# Altium PCB logi-edu.PcbDoc (part 1 of 2)
Units mil, origin at the board's own origin, x right, y up, seen from the top; angles counter-clockwise.
Board outline 3607 x 2055 mil, 4 copper layers (Top Layer, Mid-Layer 1, Mid-Layer 2, Bottom Layer); 75 components, 66 nets, 321 pads, 127 vias.
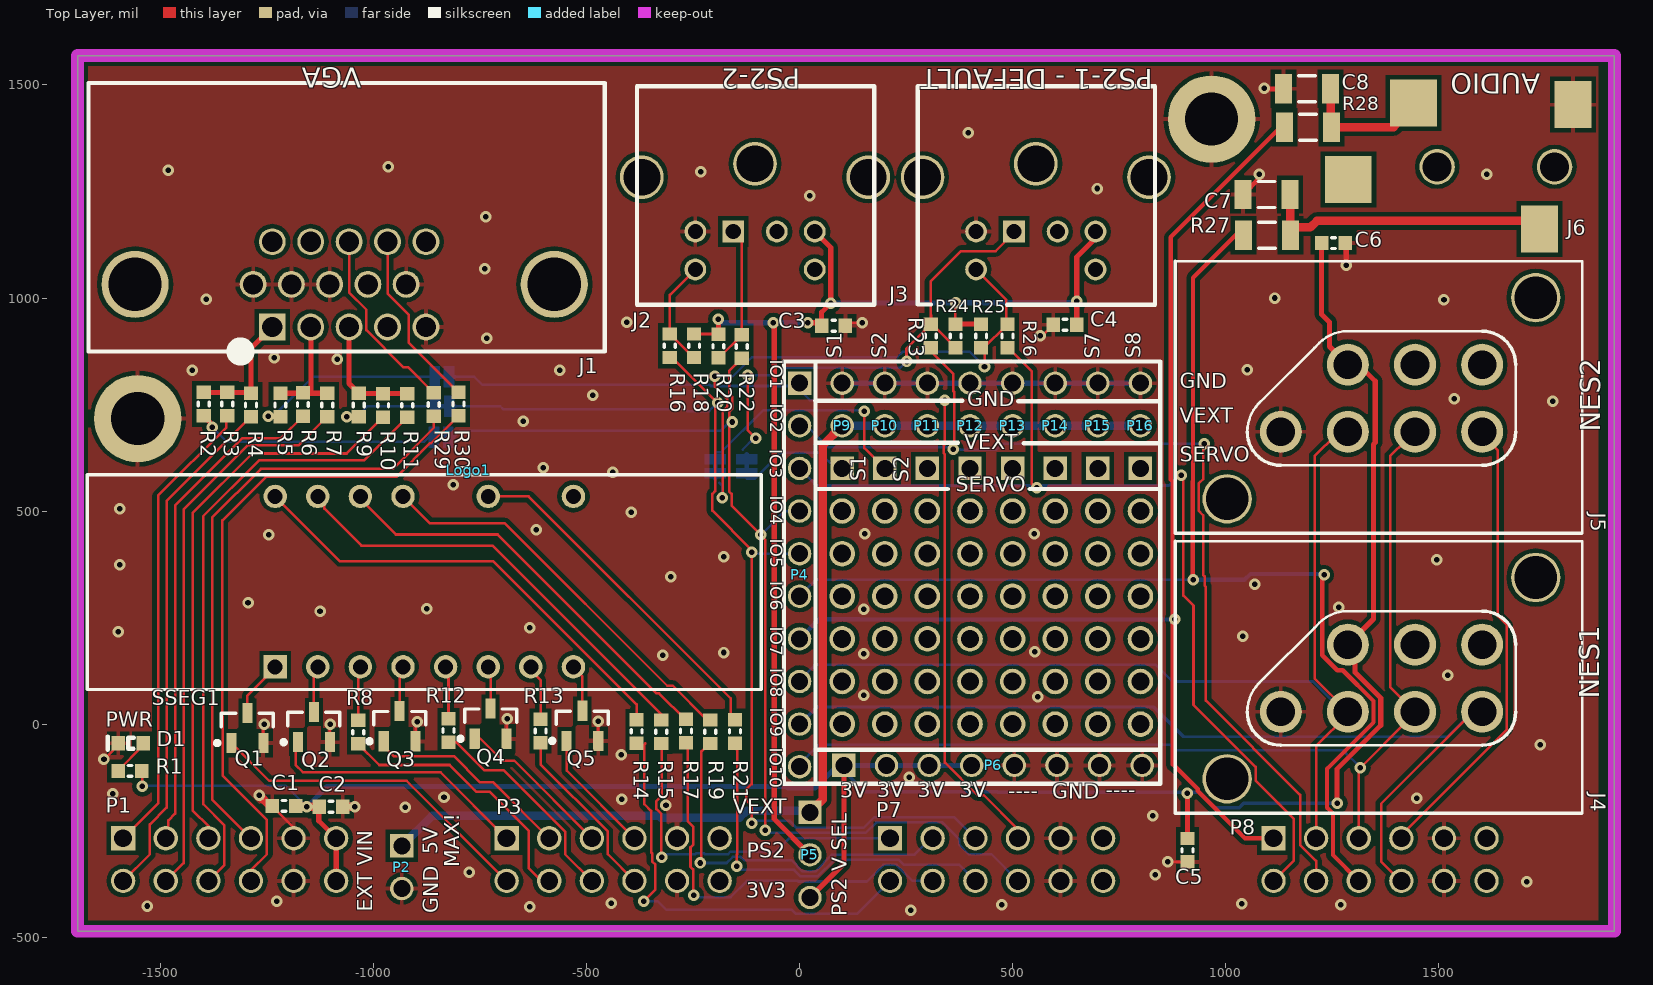
[diagram p0: Top Layer view]
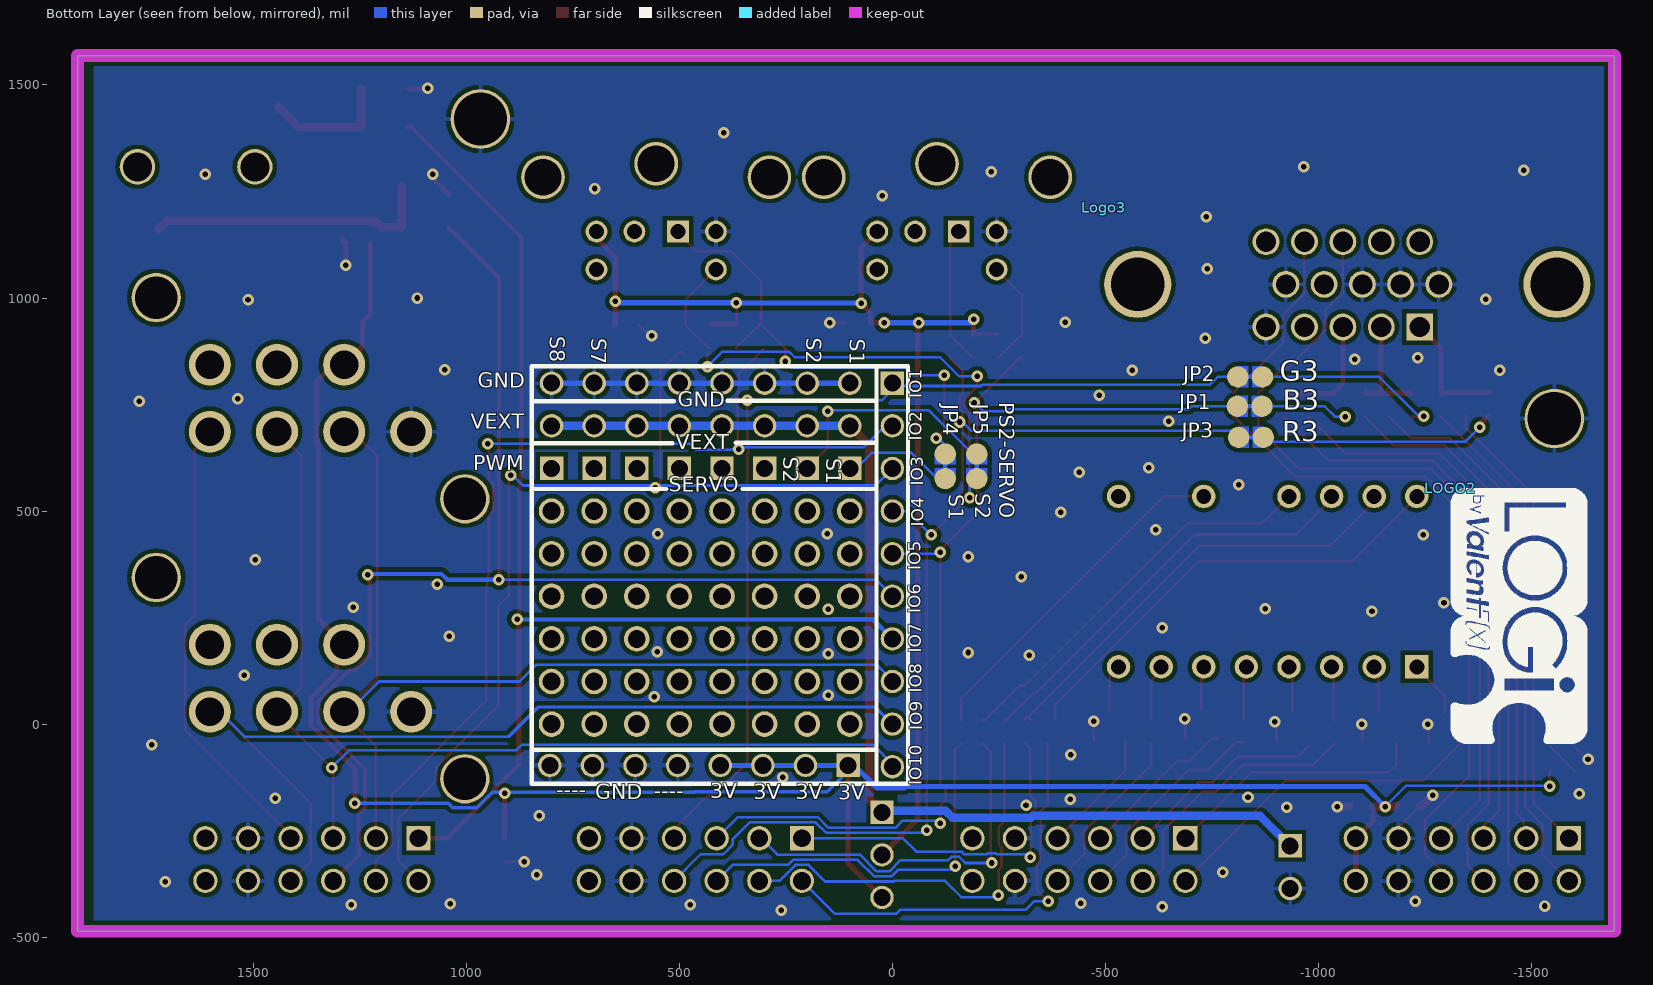
[diagram p1: Bottom Layer view, seen from below]
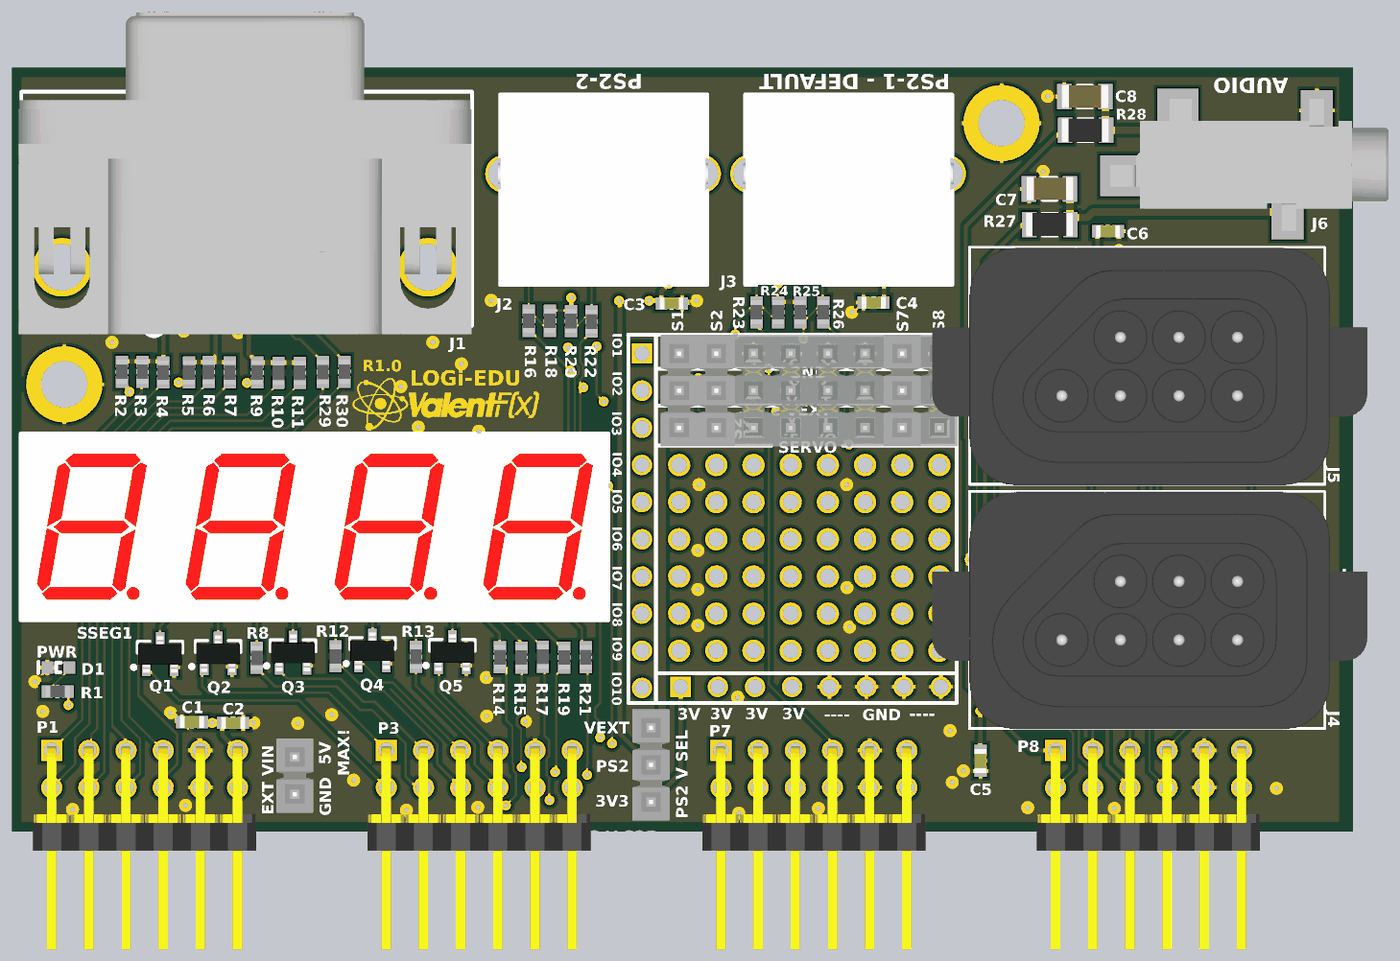
[diagram p3: 3D render of the assembled board from above, using the file's embedded part models]

## Layer stack, top to bottom
Top Solder: solder mask 0.4, Solder Resist, Dk 3.5
Top Layer: signal copper 1.4
Dielectric1: dielectric 12.6, FR-4, Dk 4.8
Mid-Layer 1: signal copper 1.4
Dielectric2: dielectric 12.6, FR-4, Dk 4.8
Mid-Layer 2: signal copper 1.4
Dielectric3: dielectric 12.6, FR-4, Dk 4.8
Bottom Layer: signal copper 1.4
Bottom Solder: solder mask 0.4, Solder Resist, Dk 3.5

## Board outline
-1694.56,-486 1912.44,-486 1912.44,1569 -1694.56,1569

## Design rules (kind name [scope] priority, off if disabled: settings)
Clearance Poly [InPoly] p1: gap=10
Clearance [All] p2: gap=6
ComponentClearance clearance_logo [(ObjectKind = 'Component') And  (Name = 'Logo1')  or (ObjectKind = 'Component') And  (Name = 'Logo2')   or (ObjectKind = 'Component') And  (Name = 'Logo3')   or (ObjectKind = 'Component') And  (Name = 'Logo4')   or (ObjectKind = 'Component') And  (Name = 'Logo5')] p1: gap=0 collisioncheckmode=3 verticalgap=10 showdistances=FALSE
ComponentClearance ComponentClearance_1 [OnLayer('Mechanical 1')] p2: gap=0 collisioncheckmode=3 verticalgap=0 showdistances=FALSE
ComponentClearance [All] p3: gap=1 collisioncheckmode=3 verticalgap=10 showdistances=FALSE
Height [All] p1: minheight=0 maxheight=1500 prefheight=500
HoleSize [All] p1: absolutevalues=TRUE maxlimit=250 minlimit=1 maxpercent=80.000 minpercent=20.000
HoleToHoleClearance [All] p1: gap=2 allowstackedmicrovias=TRUE
MinimumSolderMaskSliver [All] p1: minsoldermaskwidth=0
PlaneClearance [All] p1: clearance=10
PolygonConnect via [isvia] p1: connectstyle=Direct reliefconductorwidth=10 reliefentries=4 polygonreliefangle="90 Angle" airgapwidth=10
PolygonConnect PolygonConnect_1 [All] p2: connectstyle=Relief reliefconductorwidth=10 reliefentries=4 polygonreliefangle="90 Angle" airgapwidth=10
RoutingVias [All] p1: holewidth=13 width=27 viastyle="Through Hole" minholewidth=13 minwidth=27 maxholewidth=13 maxwidth=27
SilkToSilkClearance [All] p1: silktosilkclearance=0
SilkToSolderMaskClearance SilkscreenOverComponentPads [IsPad] p1: minsilkscreentomaskgap=0 clearancetoexposedcopper=TRUE
SolderMaskExpansion SolderMaskExpansion_1 [ISVIA] p1: expansion=-100
SolderMaskExpansion [All] p2: expansion=4
Width [All] p1: maxlimit=20 minlimit=6 preferedwidth=12
21 further rules are at their usual default settings.

## Classes and differential pairs
component class logi-edu-top: Logo1 LOGO2 Logo2 Logo3 Screw1 Screw2 STDOFF1 STDOFF2
component class ANALOG_IO: C53

## Components (designator, comment, footprint, x,y, rotation, side; value= is the part's Value field where it differs from the comment)
C1 "4.7uF" C0603 -1210,-192 r180 top
C2 ".1uF" C0603 -1100,-194 r0 top
C3 ".1uF" C0603 80,935 r180 top
C4 ".1uF" C0603 623,937 r0 top
C5 ".1uF" C0603 910.44,-296 r270 top
C6 ".1uF" C0603 1253,1129 r0 top
C7 "4700pF" C1206 1096,1243 r180 top
C8 "4700pF" C1206 1191,1491 r180 top
D1 "598-8010-107F" "LED_0603 - RED" -1569.56,-45 r180 top
J1 "VGA" 1-1734530-1 -1237.56,932 r180 top locked
J2 "PS/2" "MD-60S - PS/2" -104.56,1067 r180 top locked
J3 "PS/2" "MD-60S - PS/2" 554.44,1067 r180 top locked
J4 "450-32360" "NES - 450-32360" 1129.44,29 r90 top locked
J5 "450-32360" "NES - 450-32360" 1129.44,686 r90 top locked
J6 "SJ-3524-SMT-TR" SJ-3524-SMT 1772,1308 r180 top
JP1 "Solder Jumper-NC" SOLDER_JUMPER-NC -809.56,746 r0 bottom net-tie
JP2 "Solder Jumper-NC" SOLDER_JUMPER-NC -810.56,815 r0 bottom net-tie
JP3 "Solder Jumper-NC" SOLDER_JUMPER-NC -812.56,673 r0 bottom net-tie
JP4 "Solder Jumper-NC" SOLDER_JUMPER-NC -124,634 r90 bottom net-tie
JP5 "Solder Jumper-NC" SOLDER_JUMPER-NC -198,576 r270 bottom net-tie
Logo1 "Valent Logo 500" VALENTFX_500-SolderMask -777.56,596 r0 top
LOGO2 "LOGI-600" LOGI-600-SILK -1309.56,554 r270 bottom
Logo3 "Valent Logo 1000" ValentFX_1000-SolderMask -495.56,1212 r180 bottom
P1 "MTSW-106-07-G-D-130-RA" "PMOD HEADER - Male"#1 -1587.56,-268 r180 top locked
P2 "Header2 - Male" "HDR - PRPC002SAAN-RC" -933.56,-286 r270 top
P3 "MTSW-106-07-G-D-130-RA" "PMOD HEADER - Male"#2 -437.56,-318 r180 top
P4 "Header10" "HEADER_10_40_100THRU SIP" 0,800 r270 top
P5 "Header3 Male" "HDR - PRPC003SAAN-RC" 24.44,-207 r270 top
P6 "Header8" "HEADER_8_40_100THRU SIP" 104,-97 r0 top locked
P7 "MTSW-106-07-G-D-130-RA" "PMOD HEADER - Male"#2 462.44,-318 r180 top
P8 "MTSW-106-07-G-D-130-RA" "PMOD HEADER - Male"#2 1362.44,-318 r180 top
P9 "Header3 Male" "HDR - PRPC003SAAN-RC" 100,600 r90 top
P10 "Header3 Male" "HDR - PRPC003SAAN-RC" 200,600 r90 top
P11 "Header3 Male" "HDR - PRPC003SAAN-RC" 300,600 r90 top
P12 "Header3 Male" "HDR - PRPC003SAAN-RC" 400,600 r90 top
P13 "Header3 Male" "HDR - PRPC003SAAN-RC" 500,600 r90 top
P14 "Header3 Male" "HDR - PRPC003SAAN-RC" 600,600 r90 top
P15 "Header3 Male" "HDR - PRPC003SAAN-RC" 700,600 r90 top
P16 "Header3 Male" "HDR - PRPC003SAAN-RC" 800,600 r90 top
Q1 "DMN65D8L-7" SOT-23 -1296,-9 r90 top
Q2 "DMN65D8L-7" SOT-23 -1140,-7 r90 top
Q3 "DMN65D8L-7" SOT-23 -938.56,-5 r90 top
Q4 "DMN65D8L-7" SOT-23 -725,1 r90 top
Q5 "DMN65D8L-7" SOT-23 -510,-4 r90 top
R1 "330" R0603 -1571.56,-110 r0 top
R2 "1.5k" R0603 -1398.56,751 r90 top
R3 "330" R0603 -1343.56,751 r90 top
R4 "680" R0603 -1287.56,749 r90 top
R5 "1.5k" R0603 -1218.56,749 r90 top
R6 "330" R0603 -1165.56,750 r90 top
R7 "680" R0603 -1108.56,749 r90 top
R8 "100" R0603 -1036,-19 r270 top
R9 "1.5k" R0603 -1034.56,749 r90 top
R10 "330" R0603 -977.56,748 r90 top
R11 "680" R0603 -920.56,748 r90 top
R12 "100" R0603 -824,-15 r270 top
R13 "100" R0603 -608,-16 r270 top
R14 "100" R0603 -382.56,-17 r270 top
R15 "100" R0603 -324.56,-18 r270 top
R16 "220" R0603 -304.56,888 r90 top
R17 "100" R0603 -266.56,-16 r270 top
R18 "10k" R0603 -247.56,888 r90 top
R19 "100" R0603 -209.56,-18 r270 top
R20 "10k" R0603 -190.56,887 r90 top
R21 "100" R0603 -151.56,-17 r270 top
R22 "220" R0603 -135.56,886 r90 top
R23 "220" R0603 308,911 r90 top
R24 "10k" R0603 366,911 r90 top
R25 "10k" R0603 426,911 r90 top
R26 "220" R0603 488,911 r90 top
R27 "3.3k" R1206 1097,1147 r0 top
R28 "3.3k" R1206 1193,1401 r0 top
R29 "100" R0603 -858.56,750 r270 top
R30 "100" R0603 -800.56,751 r270 top
SSEG1 "7SEG" "LED - SSEG - LTC-4727JR" -1230.75,134.33 r0 top locked

## Footprints (in the part's own frame and the unit in brackets; to place one, negate y for a bottom-side part, rotate by r counter-clockwise, add the part's x,y. Pads: shape width x height; smd on the part's side, far side on the other; paste and mask are expansions set on the pad)
1-1734530-1 [mm] "VGA DB15 HD connector female"
  rect 1.6x1.6 hole 1.2: 1(0,0)
  round 1.6 hole 1.2: 2(-2.29,0) 3(-4.58,0) 4(-6.87,0) 5(-9.16,0) 6(1.14,-2.54) 7(-1.14,-2.54) 8(-3.42,-2.54) 9(-5.7,-2.54) 10(-7.98,-2.54) 11(0,-5.08) 12(-2.29,-5.08) 13(-4.58,-5.08) 14(-6.87,-5.08) 15(-9.16,-5.08)
  round 4 hole 3.18: X(-16.81,-2.54) X(8.18,-2.54)
  silkscreen extent -19.82,-14.54 10.96,1.54, body extent -19.79,-20.01 11.16,2.04, height 12.25
C0603 [mm] "0603 Generic"
  rect 0.8x0.85 smd: 1(-0.7,0) 2(0.7,0)
  silkscreen extent -0.1,-0.33 0.1,0.33, body extent -0.8,-0.42 0.82,0.4, height 0.46
C1206 [mm] "1206 Generic"
  rect 1x1.75 smd: 1(-1.4,0) 2(1.4,0)
  silkscreen extent -0.5,-0.77 0.5,0.77, body extent -1.63,-0.82 1.57,0.78, height 1.25
"HDR - PRPC002SAAN-RC" [mil]
  rect 55x55 hole 40: 1(0,0)
  round 55 hole 40: 2(100,0)
  body extent -50,-50 150,50, height 205
"HDR - PRPC003SAAN-RC" [mil]
  rect 55x55 hole 40: 1(0,0)
  round 55 hole 40: 2(100,0) 3(200,0)
  body extent -50,-50 250,50, height 205
"HEADER_8_40_100THRU SIP" [mil]
  rect 55x55 hole 40: 1(0,0)
  round 55 hole 40: 2(100,0) 3(200,0) 4(300,0) 5(400,0) 6(500,0) 7(600,0) 8(700,0)
"HEADER_10_40_100THRU SIP" [mil] "HEADER 100 MIL PITCH"
  rect 55x55 hole 40: 1(0,0)
  round 55 hole 40: 2(100,0) 3(200,0) 4(300,0) 5(400,0) 6(500,0) 7(600,0) 8(700,0) 9(800,0) 10(900,0)
"LED - SSEG - LTC-4727JR" [mil] "LED - SSEG - LTC-4727JR"
  rect 55x55 hole 35: 1(0,0)
  round 55 hole 35: 2(100,0) 3(200,0) 4(300,0) 5(400,0) 6(500,0) 7(600,0) 8(700,0) 9(700,400) 11(500,400) 13(300,400) 14(200,400) 15(100,400) 16(0,400)
  silkscreen extent -441,-53 1141,451, body extent -441,-53 1141,451, height 276
"LED_0603 - RED" [mm] "LED_0603"
  rect 0.8x0.85 smd: A(-0.75,0) C(0.75,0)
  silkscreen extent -0.18,-0.41 1.37,0.38, body extent -0.8,-0.4 0.8,0.4, height 0.75
LOGI-600-SILK [mil]
  silkscreen extent 0,2 600,321
"MD-60S - PS/2" [mm]
  rect 1.3x1.3 hole 0.9: 1(1.3,-2.26)
  round 1.3 hole 0.9: 2(-1.3,-2.26) 3(3.56,-2.26) 4(-3.56,-2.26) 5(3.56,0) 6(-3.56,0)
  round 2.6 hole 2.2: x(-6.75,-5.5) x(0,-6.3) x(6.75,-5.5)
  silkscreen extent -7.11,-10.92 7.04,2.1, body extent -7.17,-11 7.17,2.1, height 13.3
"NES - 450-32360" [mm] "NES Controller Socket"
  round 2.5 hole 1.7: 1(0,0) 2(0,-4) 3(0,-8) 4(0,-12) 5(4,-12) 6(4,-8) 7(4,-4)
  round 2.94 hole 2.54 paste+0: 8(-4,3.2) 9(8,-15.2)
  silkscreen extent -6.04,-17.96 10.16,6.3, body extent -6.12,-20.85 10.13,8.86, height 17.61
"PMOD HEADER - Male"#1 [mil] "68021-212HLF"
  rect 57x57 hole 42: 1(0,0)
  round 57 hole 42: 2(-100,0) 3(-200,0) 4(-300,0) 5(-400,0) 6(-500,0) 7(0,100) 8(-100,100) 9(-200,100) 10(-300,100) 11(-400,100) 12(-500,100)
  body extent -550,-10 50,536, height 225
"PMOD HEADER - Male"#2 [mil] "68021-212HLF"
  rect 57x57 hole 42: 1(250,-50)
  round 57 hole 42: 2(150,-50) 3(50,-50) 4(-50,-50) 5(-150,-50) 6(-250,-50) 7(250,50) 8(150,50) 9(50,50) 10(-50,50) 11(-150,50) 12(-250,50)
  body extent -300,-60 300,486, height 225
R0603 [mm] "0603 Generic"
  rect 0.8x0.85 smd: 1(-0.7,0) 2(0.7,0)
  silkscreen extent -0.1,-0.33 0.1,0.33, body extent -0.81,-0.41 0.81,0.41, height 0.46
R1206 [mm] "1206 Generic"
  rect 1x1.75 smd: 1(-1.4,0) 2(1.4,0)
  silkscreen extent -0.5,-0.77 0.5,0.77, body extent -1.63,-0.8 1.57,0.8, height 0.55
SJ-3524-SMT [mm] "3.5MM Stereo Audio Jack"
  rect 2.2x2.8 smd: 1(-1.1,-3.7) 3(0.9,3.7)
  rect 2.8x2.8 smd: 2(8.4,-3.81) 4(12.3,0.75)
  round 2.108 hole 1.727 unplated: H1(7,0) H2(0,0)
  body extent -5.99,-4.5 13.01,4.5, height 5
SOLDER_JUMPER-NC [mil]
  round 50 smd: 1(0,0) 2(-58,0)
  Top Layer region: 0.09,-24.99 -24.91,-24.99 -24.91,25.01 0.09,25.01
  Top Layer region: -32.91,-24.99 -57.91,-24.99 -57.91,25.01 -32.91,25.01
  Top Layer lines w10: -50,0 0,0
SOT-23 [mm] "SOT-23"
  rect 1.2x0.6 smd: 1(-0.9,0.95) 2(-0.9,-0.95) 3(0.9,0)
  silkscreen extent -1.02,-1.55 0.87,1.92, body extent -1.27,-1.5 1.23,1.5, height 1.07
VALENTFX_500-SolderMask [mil]
ValentFX_1000-SolderMask [mil]

## Part data
C1: library part "C0603 - GRM188F51A475ZE20D", "4.7uF 10volts Y5V +80-20% (MLCC) - SMD/SMT 0603"
C2 C3 C4 C5 C6: library part "C0603 - GRM188R71H104KA93D", "0.1uF 50volts X7R 10% MLCC SMD/SMT 0603"
C7 C8: library part "C1206 - C1206C472K5RACTU", "CAP CER 4700PF 50V 10% X7R 1206"
D1: library part "LED0603 - 598-8010-107F", "LED ALINGAP RED CLEAR 0603 SMD"
J1: library part "VGA - 1-1734530-1", "CONN HD D-SUB RCPT R/A 15POS"
J2 J3: library part "Con - D-60S", "CONN MINIDIN RECPT UNSHIELD 6POS - PS/2 mouse - keybaord"
J4 J5: "NES CONTROLLER SOCKET"
J6: "CONN AUDIO JACK 3.5MM STEREO SMD"
JP1 JP2 JP3 JP4 JP5: "Solder/Configuration Jumper"
P1 P3 P7 P8: library part "P-MOD - MTSW-106-07-G-D-130-RA", "Samtec Male Conn Unshrouded Header HDR 12 POS 2.54mm Solder RA Thru-Hole"
P2: library part "HDR - PRPC002SAAN-RC", "2POS male CONN HEADER .100\" SNGL STR"
P4: "Header 10 pin"
P5 P9 P10 P11 P12 P13 P14 P15 P16: library part "HDR - PRPC003SAAN-RC", "3POS Male CONN HEADER .100\" SNGL STR"
P6: "Header 8 pin"
Q1 Q2 Q3 Q4 Q5: library part "NMOS - DMN65D8L-7", "MOSFET N-CH 60V 310MA SOT23"
R1 R3 R6 R10: library part "R0603 - ERJ-3EKF3300V", "RES 330 OHM 1/10W 1% 0603 SMD"
R2 R5 R9: library part "R0603 - ERJ-3EKF1501V", "RES 1.5K OHM 1/10W 1% 0603 SMD"
R4 R7 R11: library part "R0603 - ERJ-3EKF6800V", "RES 680 OHM 1/10W 1% 0603 SMD"
R8 R12 R13 R14 R15 R17 R19 R21 R29 R30: library part "R0603 - CRCW0603100RFKEA", "100 ohms 1% Thick Film Resistors - SMD 1/10watt"
R16 R22 R23 R26: library part "R0603 - ERJ-3EKF2200V", "220 - thick Film Resistors - SMD 0603 220ohms 1% Tol"
R18 R20 R24 R25: library part "R0603 - CRCW060310K0FKEA", "10k Thick Film Resistors - SMD 1/10watt 10Kohms 1%"
R27 R28: library part "R1206 - ERJ-8ENF3301V", "RES 3.3K OHM 1/4W 1% 1206 SMD"
SSEG1: library part "LED - SSEG - LTC-4727JR", "LED Displays & Accessories 4 Digit, Red Low Current"

## Free pads (board coordinates)
  round 205 / inner round 140 / far side round 140 hole 125: MT1(967,1420) MT2(-1553.56,717)
  round 60 hole 42: X(100,0) X(100,100) X(100,200) X(100,300) X(100,400) X(100,500) X(200,0) X(200,100) X(200,200) X(200,300) X(200,400) X(200,500) X(300,0) X(300,100) X(300,200) X(300,300) X(300,400) X(300,500) X(400,0) X(400,100) X(400,200) X(400,300) X(400,400) X(400,500) X(500,0) X(500,100) X(500,200) X(500,300) X(500,400) X(500,500) X(600,0) X(600,100) X(600,200) X(600,300) X(600,400) X(600,500) X(700,0) X(700,100) X(700,200) X(700,300) X(700,400) X(700,500) X(800,0) X(800,100) X(800,200) X(800,300) X(800,400) X(800,500)

## Via types
v1: diameter 27, hole 13, Top Layer to Bottom Layer, 127 vias

## Nets (pads, with @x,y where several pads share a name; then routed paths per layer and width w, separated by ;. In a path a pad name is that pad's centre, name@x,y a point inside that pad or via, vN(x,y) a via of type N, cw(c..) or ccw(c..) an arc to the next point about the centre after c; other vN are vias at no path point)
3V3: C1.1 C2.1 C5.1 C6.1 J4.7 J5.7 P1.6 P1.12 P5.3 P6.1 P6.2 P6.3 P6.4 R1.2 | length 5392.8
  Top Layer w6: R1.2@-1544,-110 -1542.56,-111.44 v1(-1542.56,-146)
  Top Layer w12: C2.1@-1128.56,-209.56 -1128.56,-227 P1.6@-1087.56,-268 ; P1.6@-1091,-273 -1087.56,-276.44 P1.12@-1087.56,-368 ; P5.3@24.44,-407 104,-327.44 P6.1@104,-97 ; v1(909.44,-162) 911.44,-162 910.44,-163 C5.1@910.44,-268.44 ; C6.1@1225.44,1129 1225,1128.56 1225,962 1244,943 1244,886.4 J5.7@1286.92,843.48 ; v1@1261,-186 1261,-106.12 1364.13,-2.98 1364.13,60.98 1304,121.12 J4.7@1304,174 ; J4.7@1286.92,186.48 1347,246.56 1347,656.51 1351.13,660.65 1351.13,804.87 J5.7@1304,852
  Top Layer w20: C1.1@-1182.44,-192 -1180.44,-194 v1(-1156.5,-194) C2.1@-1127.56,-194
  Bottom Layer w6: v1(-1542.56,-146) -1541.06,-144.5 -1206,-144.5 v1(-1156.5,-194)
  Bottom Layer w8: P6.1@92,-98 153,-159 464.21,-159 465.21,-160 938.99,-160 975.34,-196.35 1031.57,-196.35 1041.93,-186 v1(1262.44,-186)
  Bottom Layer w12: v1(-1156.5,-194) -1109,-146.5 -31,-146.5 -27.5,-150 36.44,-150 89.44,-97 P6.1@104,-97 P6.2@204,-97 P6.3@304,-97 P6.4@404,-97
EXT_VIN: P2.1 P5.1 P9.2 P10.2 P11.2 P12.2 P13.2 P14.2 P15.2 P16.2 | length 2635.2
  Top Layer w20: P5.1@24.44,-207 54,-177.44 54,654 P9.2@100,700
  Bottom Layer w20: P2.1@-933.56,-286 -863.06,-215.5 -329.78,-215.5 -325.78,-219.5 -140.78,-219.5 -124.78,-203.5 20.94,-203.5 P5.1@24.44,-207 ; P9.2@100,700 P10.2@200,700 P11.2@300,700 P12.2@400,700 P13.2@500,700 P14.2@600,700 P15.2@700,700 P16.2@800,700
GND: C1.2 C2.2 C3.1 C4.1 C5.2 C6.2 C7.2 C8.2 D1.C J1.5 J1.6 J1.7 J1.8 J1.10 J2.3 J3.3 J4.1 J5.1 J6.1 P1.5 P1.11 P2.2 P3.5 P3.11 P6.5 P6.6 P6.7 P6.8 P7.5 P7.11 P8.5 P8.11 P9.3 P10.3 P11.3 P12.3 P13.3 P14.3 P15.3 P16.3 pad.MT1 pad.MT2 Q1.2 Q2.2 Q3.2 Q4.2 Q5.2 | length 1440.9
  Top Layer w6: v1(-1632.56,-83) -1632.09,-83 D1.C@-1602.09,-53 ; Q1.2@-1258.6,-44.43 -1258.6,-2.6 v1(-1256,0) ; C1.2@-1238,-192 -1187.56,-242.44 P1.5@-1187.56,-268 ; Q2.2@-1102.6,-42.43 -1102.6,-0.6 v1(-1102,0) ; v1(-1044,-194) v1@-1041,-191 ; Q3.2@-901.16,-40.43 -901.16,1.84 v1(-897,6) ; Q4.2@-687.6,-34.43 -687.6,11.4 v1(-686,13) ; v1(-473,7) -472.6,6.6 Q5.2@-472.6,-39.43 ; C3.1@108.56,942 v1(147,942) ; v1(564.44,911) 569.44,911 C4.1@595.44,937 ; v1(864.44,-323) 865,-323.56 C5.2@910.44,-323.56
  Top Layer w12: C7.2@1040.88,1243 1079,1281.12 v1(1079,1290) ; v1(1091,1492) 1092,1491 C8.2@1135.88,1491 ; C6.2@1280.56,1129 1283,1126.56 v1(1283,1077) ; C6.2@1289.56,1129 C6.2@1289.56,1138
  Top Layer w20: v1(-1268,-167) -1243,-192 -1238,-192 C1.2@-1237.56,-192 ; C2.2@-1072.44,-194 v1(-1044,-194)
  Bottom Layer w12: P9.3@100,800 P10.3@200,800 P11.3@300,800 P12.3@400,800 P13.3@500,800 P14.3@600,800 P15.3@700,800 P16.3@800,800
  other v1: 260.44,-437 -633.56,-429 -1531.56,-427 474.44,-424 1270.44,-424 1037.44,-422 -441.56,-421 -1227.56,-416 1706.44,-370 834.44,-354 -775.56,-348 828.44,-215 -925.56,-195 -313.56,-190 -417.56,-176 1449,-174 -834.56,-172 -1611.56,-163 257.44,-125 -418.56,-72 1738.44,-49 558.44,64 150.44,68 1521.44,115 -321.56,162 150.44,165 -177.56,168 551.44,170 1040.44,206 -1598.56,217 -633.56,226 -1125.56,265 150.44,270 -875.56,271 1265,274 -1294.56,285 1068.44,327.9 -302.56,346 -1595.56,374 1495.44,386 -177.56,393 -1245.56,444 153.44,447 550.44,447 -617.56,456 -394.56,497 -1595.56,505 -812.56,562 -439,591 -601.56,602 -648.56,711 1767.44,758 1536.44,764 -485.56,772 -1425.56,830 -562.56,830 1050.7,831.87 -1085.56,856 -1232.56,860 -734.56,906 -405.56,943 1512.44,996 -1392.56,997 1115.44,1000 -738.56,1069 -736.56,1190.65 23.44,1240 698.44,1257 1612.44,1291 -231.56,1296 -1481.36,1300 -965.56,1308 395.44,1388
NES1_DAT/IO9: J4.4 P4.9 P8.10 | length 2147.8
  Top Layer w6: P8.10@1406,-364 1365,-323 1365,-187 1571,19 J4.4@1588,19
  Bottom Layer w6: 901,-29.21 1520.79,-29.21 J4.4@1577,27
  Bottom Layer w8: P4.9@0,0 40,40 831.79,40 901,-29.21
NES2_DAT: J5.4 P8.4 | length 1062.9
  Top Layer w6: P8.4@1412.44,-268 1412.44,-260.56 1660.09,-12.91 1660.09,232.69 1639.1,253.68 1639.1,637.9 1638.1,636.9 1638.1,642.9 J5.4@1611,670
NES_CLK/IO8: J4.2 J5.2 P4.8 P8.2 | length 2377.1
  Top Layer w6: P8.2@1212.44,-268 1212.44,-51.56 J4.2@1288,24 ; J5.2@1263,680 1260,680 1208.94,628.94 1208.94,106.98 J4.2@1286.92,29
  Bottom Layer w6: P4.8@-6,97 36,139 836,139 875,100 1205,100 J4.2@1277,28
NES_LAT/IO10: J4.3 J5.3 P4.10 P8.3 | length 2385.7
  Top Layer w6: P8.3@1312.44,-268 v1@1312.44,-106.56 ; v1@1316.5,-102.5 J4.3@1427,8 ; J5.3@1423,666 1386.19,629.19 1386.19,87.21 J4.3@1444.4,29 ; J4.3@1428,7 J4.3@1447.2,26.2
  Bottom Layer w6: P4.10@-5,-99 46,-48 869.39,-48 883,-61.61 1275.61,-61.61 v1(1316,-102)
NetC7_1: C7.1 J6.3 R27.2 | length 680.9
  Top Layer w20: C7.1@1151.12,1262 1151.12,1167 1152.12,1166 1199,1166 1214.07,1181.06 1703.83,1181.06 J6.3@1722.57,1162.33
NetC8_1: C8.1 J6.2 R28.2 | length 303.5
  Top Layer w20: C8.1@1246.12,1491 1246.12,1403 R28.2@1248.12,1401 1394.29,1401 J6.2@1441.29,1448
NetD1_A: D1.A R1.1 | length 80.2
  Top Layer w6: R1.1@-1599.12,-110 -1599.12,-109.09 D1.A@-1543.03,-53
NetJ1_1: J1.1 R2.2 R3.2 R4.2 | length 291
  Top Layer w12: R2.2@-1401.56,778.56 -1345.56,778.56 -1289.56,778.56 R4.2@-1287.56,776.56 -1287.56,882 J1.1@-1237.56,932
NetJ1_2: J1.2 R5.2 R6.2 R7.2 | length 282.5
  Top Layer w6: R6.2@-1161.65,786.62 R6.2@-1152.02,777 ; J1.2@-1147.56,931.16 -1147.56,931.84 J1.2@-1147.4,932 ; R7.2@-1112.61,786.62 R7.2@-1111.61,787.62 ; R7.2@-1108.56,777 R7.2@-1104.56,777
  Top Layer w12: R5.2@-1218.56,776.56 R7.2@-1108.56,776.56 ; -1146.56,778.56 J1.2@-1146.56,931.16
NetJ1_3: J1.3 R9.2 R10.2 R11.2 | length 291
  Top Layer w6: J1.3@-1065.56,935 J1.3@-1057.24,926.69
  Top Layer w12: J1.3@-1057.24,932 -1057.24,926.69 -1057.24,799.24 R9.2@-1034.56,776.56 -1033.56,775.56 R10.2@-977.56,775.56 R11.2@-920.56,775.56
NetJ1_13: J1.13 R29.1 | length 443.4
  Top Layer w6: J1.13@-1057.24,1132 -1057.24,1012.99 -1016.75,972.5 -1016.75,924.39 -930.36,838 -919,838 R29.1@-858.56,777.56
NetJ1_14: J1.14 R30.1 | length 422.5
  Top Layer w6: J1.14@-967.09,1132 -967.09,1010.53 -917.43,960.87 -917.43,915.23 -917.56,915.09 -917.56,895.56 R30.1@-800.56,778.56
NetJ2_1: J2.1 R20.1 R22.2 | length 328.2
  Top Layer w6: R20.1@-190.56,859.44 -189.68,859.44 R22.2@-135.56,913.56 -135.56,1135.8 J2.1@-155.74,1155.98
NetJ2_5: J2.5 R16.2 R18.1 | length 256.1
  Top Layer w6: R18.1@-247.56,860.44 -249.44,860.44 R16.2@-304.56,915.56 -304.56,1007.16 J2.5@-244.72,1067
NetJP1_2: JP1.2 R9.1 | length 241.5
  Top Layer w6: v1@-1070.56,721 v1(-1062.56,721) -1035,721 R9.1@-1034.56,721.44
  Bottom Layer w6: v1(-1062.56,721) -1039.56,721 -1014.56,746 JP1.2@-867.56,746
NetJP2_2: JP2.2 R5.1 | length 444.8
  Top Layer w6: v1(-1246.56,722) -1246,721.44 R5.1@-1218.56,721.44
  Bottom Layer w6: v1(-1246.56,722) -1235.56,722 -1142.56,815 JP2.2@-868.56,815
NetJP3_2: JP3.2 R2.1 | length 565.2
  Top Layer w12: R2.1@-1398.56,723.44 -1398.56,723 -1378.56,703 v1(-1378.56,697) v1@-1375.56,700
  Bottom Layer w6: v1(-1378.56,697) -1344.56,663 -880.56,663 JP3.2@-870.56,673
NetJP4_2: JP4.2 P9.1 | length 265.3
  Bottom Layer w6: JP4.2@-124,576 -105.07,576 -43.25,637.82 -41.92,636.5 48.5,636.5 85,600 P9.1@100,600
NetJP5_2: JP5.2 P10.1 | length 545.7
  Top Layer w6: v1(152,734) 152,648 P10.1@200,600
  Bottom Layer w6: JP5.2@-198,638 -184,638 -85.5,736.5 149.5,736.5 v1(152,734)
NetQ1_3: Q1.3 SSEG1.1 | length 133.9
  Top Layer w6: Q1.3@-1296,26.43 -1296,67 SSEG1.1@-1230,133
NetQ2_3: Q2.3 SSEG1.2 | length 107.5
  Top Layer w6: Q2.3@-1140,28.43 -1140,125 -1133,132 SSEG1.2@-1133,133
NetQ3_3: Q3.3 SSEG1.4 | length 104.7
  Top Layer w6: Q3.3@-938.56,30.43 -938.56,124.44 SSEG1.4@-931,132
NetQ4_3: Q4.3 SSEG1.6 | length 92.1
  Top Layer w6: SSEG1.6@-731,126 -725,120 Q4.3@-725,36.43
NetQ5_3: Q5.3 SSEG1.8 | length 106
  Top Layer w6: SSEG1.8@-528,130 -510,112 Q5.3@-510,31.43
NetR8_1: R8.1 SSEG1.3 | length 130.3
  Top Layer w6: R8.1@-1036,8.56 -1036,136 SSEG1.3@-1034,138
NetR12_1: R12.1 SSEG1.5 | length 127.8
  Top Layer w6: SSEG1.5@-832,137 -824,129 R12.1@-824,12.56
NetR13_1: R13.1 SSEG1.7 | length 124
  Top Layer w6: SSEG1.7@-631,126 -608,103 R13.1@-608,11.56
NetR14_1: R14.1 SSEG1.16 | length 1085.9
  Top Layer w6: SSEG1.16@-1230.75,534.33 -1078.42,382 -718.56,382 -382.56,46 R14.1@-382.56,10.56
NetR15_1: R15.1 SSEG1.15 | length 1051.5
  Top Layer w6: SSEG1.15@-1130.75,534.33 -1115.42,519 -1115.42,505.87 -1028.56,419 -720.56,419 -321.56,20 -321.56,12.56 R15.1@-324.56,9.56 ; R15.1@-316.34,17.78 -312.31,13.75 R15.1@-312.31,9.56
NetR17_1: R17.1 SSEG1.14 | length 989.7
  Top Layer w6: SSEG1.14@-1030.75,534.33 -1030.75,528.2 -947.56,445 -708.56,445 -335.56,72 -329.54,72 -267.1,9.56 R17.1@-262.06,9.56
NetR19_1: R19.1 SSEG1.13 | length 936.3
  Top Layer w6: SSEG1.13@-930.75,534.33 -867.42,471 -691.56,471 -310.56,90 -297.29,90 -216.85,9.56 R19.1@-211.81,9.56
NetR21_1: R21.1 SSEG1.11 | length 816.1
  Top Layer w6: SSEG1.11@-730.75,534.33 -635.89,534.33 -161.56,60 R21.1@-161.56,9.56
PS2_1_CLK/IO3_SERVO2: P4.3 P8.7 R26.1 | length 2346.2
  Top Layer w6: R26.1@488.44,872.44 500.44,872.44 544.44,828.44 544.44,563.56 553,555 v1(557,555) ; v1(895.44,584) 900.44,579 900.44,348.82 900.94,348.32 900.94,301.5 924.58,277.86 924.58,44.97 1070.33,-100.78 1070.33,-132.89 1159.44,-222 1159.44,-321 P8.7@1112.44,-368
  Bottom Layer w6: P4.3@0,600 40,560 v1@546,560 ; v1@557,560 867,560 889,582 v1@895.44,582
PS2_1_CLK/IO3_SERVO2_O: J3.5 JP5.1 R25.1 R26.2 | length 1290.6
  Top Layer w6: v1(-199,816) -199,792.26 -170.06,763.32 -170.06,744.68 -180.56,734.18 -180.56,532.44 v1(-182,531) ; J3.5@414.28,1067 485.44,995.84 R26.2@485.44,936 ; R25.1@426,883.44 432.88,883.44 R26.2@485.44,936 ; v1(434,839) 434.88,839.88 R25.1@434.88,872.44 ; R26.2@488,938.56 R26.2@485.44,936
  Bottom Layer w6: v1(-199,816) -156.82,816 -111.82,861 229.18,861 241.68,873.5 399.5,873.5 v1(434,839) ; JP5.1@-188.1,566.1 -181,559 -181,532 v1(-182,531)
PS2_1_DAT/IO2_SERVO1: P4.2 P8.8 R23.1 | length 2384.4
  Top Layer w6: R23.1@303.5,878.94 361,821.44 361,781.4 362.94,779.46 362.94,646.94 v1(361,645) ; v1(949.44,658) 947.44,656 947.44,575.28 936.58,564.42 936.58,500.82 947.44,489.96 947.44,349.82 950.44,346.82 950.44,325.18 953.44,322.18 953.44,55.28 1174.94,-166.22 1174.94,-283.53 1212.44,-321.03 P8.8@1212.44,-368
  Bottom Layer w6: P4.2@0,700 17,700 67,650 354.5,650 v1@361,643.5 ; v1(361,645) 377.5,645 379,643.5 460.76,643.5 475.26,658 v1(949.44,658)
PS2_1_DAT/IO2_SERVO1_O: J3.1 JP4.1 R23.2 R24.1 | length 1123.4
  Top Layer w6: v1(-122,819) -122,690 v1(-103,671) ; v1(251,851) 251,881.12 R23.2@308.44,938.56 ; R23.2@308,938.56 R23.2@308.44,938.56 ; R24.1@366,883.44 310.88,938.56 R23.2@308.44,938.56 ; J3.1@503.26,1155.98 503.26,1152.82 460.44,1110 378.44,1110 307.44,1039 307.44,961 308.44,960 R23.2@308.44,938.56
  Bottom Layer w6: JP4.1@-133.9,643.9 -106.8,671 v1(-103,671) ; v1(-122,819) -48.73,819 -31.23,836.5 236.5,836.5 v1(251,851)
PS2_2_CLK/IO5_VGA_B0: JP1.1 P4.5 P7.3 R16.1 | length 2517.9
  Top Layer w6: R16.1@-304.56,860.44 -299,860.44 v1(-192.56,754) -198,748.56 -198,546.82 -204.5,540.32 -204.5,500.94 -112.56,409 v1(-112.56,403) -112.56,-140.79 -125.56,-153.79 -125.56,-178.21 -112.56,-191.21 v1(-112.56,-233) ; P7.3@411.72,-268.72 P7.3@420,-277
  Bottom Layer w6: JP1.1@-809.56,746 -702.56,746 -695.56,739 -267.56,739 -263,734.44 -212.12,734.44 v1(-192.56,754) ; v1(-112.56,-233) -106.06,-226.5 -23.79,-226.5 -6.79,-243.5 150.24,-243.5 175.24,-218.5 362.94,-218.5 P7.3@412.44,-268 ; v1(-112.56,403) -109.56,400 P4.5@0,400
PS2_2_DAT/IO4_VGA_R0: JP3.1 P4.4 P7.10 R22.1 | length 2622.7
  Top Layer w6: v1@-165.56,709 -165.56,732.21 -158.06,739.71 -158.06,768.29 -165.56,775.79 -165.56,828.44 R22.1@-135.56,858.44 ; v1(-158,709) -165,709 -165.56,708.44 -165.56,546.38 -159.5,540.32 -159.5,512.5 v1(-91,444) ; v1@-91.28,443.72 -80.56,433 v1(-80.56,-249)
  Bottom Layer w6: JP3.1@-812.56,673 -797.56,688 -186,688 -165,709 v1(-158,709) ; v1(-91,444) -35,500 P4.4@0,500 ; v1(-80.56,-249) -74.06,-255.5 155.21,-255.5 180.21,-230.5 334.94,-230.5 374.94,-270.5 374.94,-283.53 396.91,-305.5 449.94,-305.5 P7.10@512.44,-368
PWM1/IO6: P4.6 P8.9 R27.1 | length 2983.5
  Top Layer w10: v1(923.44,339) 922.58,339.86 922.58,570.22 923.44,571.08 923.44,1047.56 R27.1@1041.88,1166 ; v1(1231.44,350) 1226.71,345.27 1226.71,161.54 1261.98,126.27 1274.81,126.27 1347.13,53.94 1347.13,4.06 1237.94,-105.13 1237.94,-196.15 1251.94,-210.15 1251.94,-307.5 P8.9@1312.44,-368
  Bottom Layer w6: P4.6@0,300 39,339 v1(923.44,339) ; v1@1229.04,350.4 1231.04,350.4 v1(1231.44,350)
  Bottom Layer w10: v1(923.44,339) 1044.89,339 1058.29,352.4 v1@1229.04,352.4
PWM2/IO7: P4.7 P8.1 R28.1 | length 3167.8
  Top Layer w6: 881,-95.04 v1(881,246)
  Top Layer w10: P8.1@1112.44,-268 1045.57,-268 934.58,-157.01 934.58,-152.49 877.13,-95.04 875.44,-95.04 875.44,569.35 870.94,573.85 870.94,1142.75 1129.19,1401 R28.1@1137.88,1401
  Bottom Layer w6: P4.7@-7,205 P4.7@-6,206
  Bottom Layer w10: P4.7@0,200 46,246 139.79,246 140.29,245.5 880.5,245.5 v1(881,246)
SEG_CTRL_A1: P3.7 Q1.1 | length 779.9
  Top Layer w6: Q1.1@-1333.4,-44.43 -1244.83,-133 -922.56,-133 P3.7@-687.56,-368
SEG_CTRL_A2: P3.1 Q2.1 | length 652.6
  Top Layer w6: Q2.1@-1183,-44 -1183,-96 -1166,-113 -842.56,-113 P3.1@-687.56,-268 ; P3.1@-714,-248 P3.1@-690,-272
SEG_CTRL_A3: P3.3 Q4.1 | length 374.4
  Top Layer w6: Q4.1@-762.4,-34.43 -749.13,-34.43 -697.56,-86 -669.56,-86 P3.3@-487.56,-268 ; P3.3@-487,-261 P3.3@-485,-263
SEG_CTRL_A4: P3.4 Q5.1 | length 292.5
  Top Layer w6: Q5.1@-544,-42 -546,-44 -546,-109.56 P3.4@-387.56,-268
SEG_CTRL_L: P3.2 Q3.1 | length 479.3
  Top Layer w6: Q3.1@-977,-51 -953,-75 -811.56,-75 -749.56,-137 -718.56,-137 P3.2@-587.56,-268